# EAGLE board Horta (EAGLE 9.7.0)

Size 209.2 x 83.78 mm. Coordinates in mm from the lower left corner, seen from the top.
Outline: 0,0 209.2,0 209.2,83.78 0,83.78 0,0
Copper layers (1*16): Top 0.035mm / dielectric 1.5mm / Bottom 0.035mm
Design rules "default": minimum track width 6mil, minimum drill 0.35mm, track to track 6mil, track to pad 6mil, pad to pad 6mil, via to via 6mil, smd to smd 6mil, copper to edge 40mil, drill to drill 6mil, minimum pad ring 10mil, minimum via ring 8mil, stop-mask expansion 4mil, vias tented up to drill 0mil, thermal gap 10mil

## Footprints (pad centres in the part's own frame; a part is rotated, then mirrored left to right if it is on the bottom)
LEDRD254W60D565H860B_G = drill 0.981 pad 1.581: 1 -1.27,0; 2 1.27,0
LEDRD254W60D565H860B_B = drill 0.981 pad 1.581: 1 -1.27,0; 2 1.27,0
LEDRD254W60D565H860B = drill 0.981 pad 1.581: 1 -1.27,0; 2 1.27,0
MOTOR = drill 1.118 pad 3.15 octagon: + 2.54,0; - -2.54,0
GL5528 = drill 0.8 pad 1.4: 1 -1.702,0; 2 1.702,0
RESAD1016W63L850D250B = drill 0.83 pad 1.43: 1 -5.08,0; 2 5.08,0
SEN-13322 = drill 1.016 long: 1 -2.54,0; 2 0,0; 3 2.54,0
ARDUINO-UNO-R3-SHIELD = drill 1.016 pad 1.88: 3.3V 24.13,-2.54; 5V 24.13,0; A0 24.13,12.7; A1 24.13,15.24; A2 24.13,17.78; A3 24.13,20.32; A4 24.13,22.86; A5 24.13,25.4; AREF -24.13,-13.97; D2 -24.13,20.32; D3 -24.13,17.78; D4 -24.13,15.24; D5 -24.13,12.7; D6 -24.13,10.16; D7 -24.13,7.62; D8 -24.13,3.81; D9 -24.13,1.27; D10 -24.13,-1.27; D11 -24.13,-3.81; D12 -24.13,-6.35; D13 -24.13,-8.89; GND@0 24.13,2.54; GND@1 24.13,5.08; GND@2 -24.13,-11.43; IOREF 24.13,-7.62; NC 24.13,-10.16; RES 24.13,-5.08; RX -24.13,25.4; SCL -24.13,-19.05; SDA -24.13,-16.51; TX -24.13,22.86; VIN 24.13,7.62

## Placement (x,y rotation side)
D1  GREEN  [LEDRD254W60D565H860B_G]  108.06,44.74 180 top
D2  BLUE  [LEDRD254W60D565H860B_B]  115.68,44.74 180 top
D3  RED  [LEDRD254W60D565H860B]  123.3,44.74 180 top
M1  MOTOR_HDR  [MOTOR]  144.56,8.26 270 top
R1  PHOTOCELL_GL5528  [GL5528]  130.92,47.28 0 top
R2  330  [RESAD1016W63L850D250B]  106.79,37.12 90 top
R3  330  [RESAD1016W63L850D250B]  114.41,37.12 90 top
R4  330  [RESAD1016W63L850D250B]  122.03,37.12 90 top
R5  10k  [RESAD1016W63L850D250B]  129.65,37.12 90 top
SEN1  SEN-13322  [SEN-13322]  202.22,77.43 0 top
U1  ARDUINO-UNO-R3-SHIELD  [ARDUINO-UNO-R3-SHIELD]  47.88,53.22 270 top

## Library data of the parts
D1 = Tinkercad; CATEGORY: Opto-Electronic; SUB-CATEGORY: LED; VALUE: LED_GREEN
D2 = Tinkercad; CATEGORY: Opto-Electronic; SUB-CATEGORY: LED; VALUE: LED_BLUE
D3 = Tinkercad; CATEGORY: Opto-Electronic; SUB-CATEGORY: LED; VALUE: LED_RED
M1 R1-R5 SEN1 U1 = Tinkercad

## Nets
D1_C: D1.2 R2.2
D2_C: D2.2 R3.2
D3_C: D3.2 R4.2
U1_5V: R1.2 SEN1.1 U1.5V
U1_A0: R1.1 R5.2 U1.A0
U1_A1: SEN1.3 U1.A1
U1_D3: M1.+ U1.D3
U1_D5: D1.1 U1.D5
U1_D6: D2.1 U1.D6
U1_D7: D3.1 U1.D7
U1_GND: M1.- R2.1 R3.1 R4.1 R5.1 SEN1.2 U1.GND@0 U1.GND@1 U1.GND@2

## Tracks (layer width: path | path; a pad name or v marks a point on that pad's centre or on a via)
D1_C  (1 unrouted)
D2_C  (1 unrouted)
D3_C  (1 unrouted)
U1_5V  (2 unrouted)
U1_A0  (2 unrouted)
U1_A1  (1 unrouted)
U1_D3  (1 unrouted)
U1_D5  (1 unrouted)
U1_D6  (1 unrouted)
U1_D7  (1 unrouted)
U1_GND  (8 unrouted)